# Altium PCB Plaque_PCB.PcbDoc
Units mil, origin at the board's own origin, x right, y up, seen from the top; angles counter-clockwise.
Board outline 3800 x 2700 mil, 2 copper layers (Top Layer, Bottom Layer), stack 61.756 mil thick; 20 components, 18 nets, 80 pads, 9 vias.
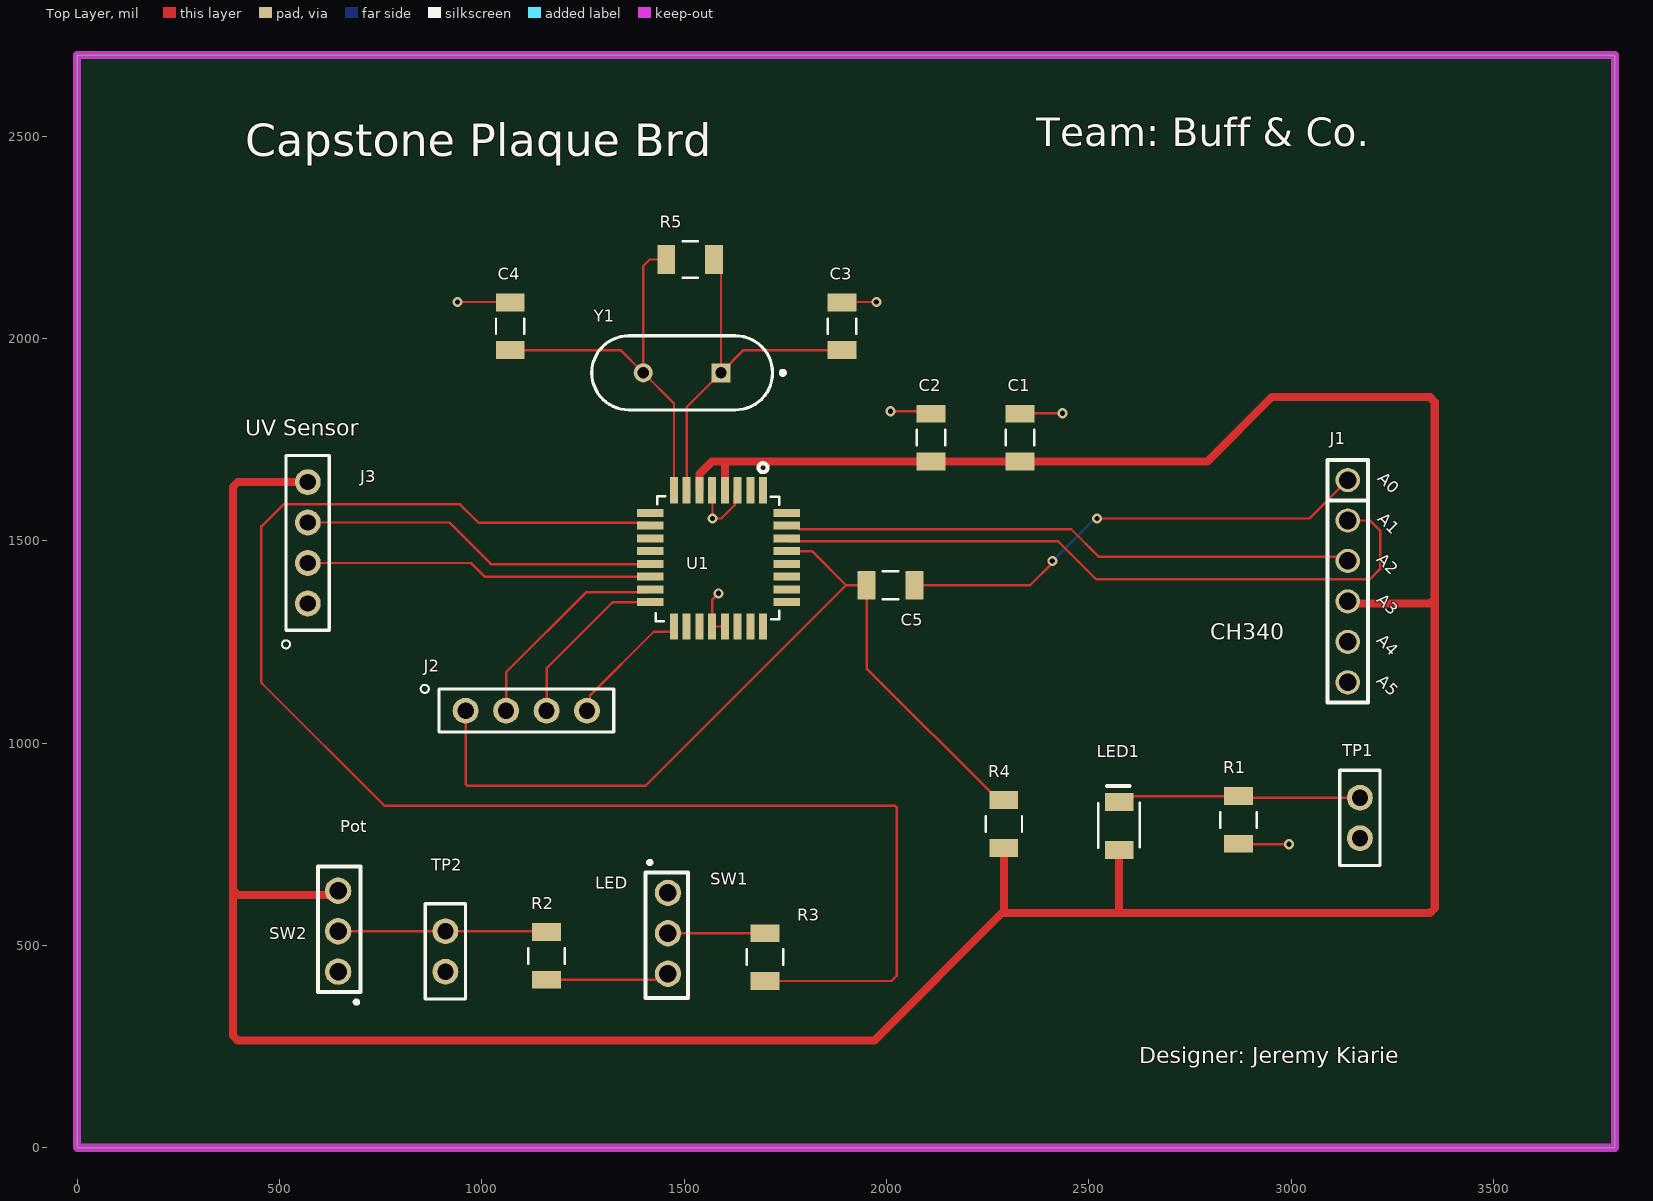
[diagram p0: Top Layer view]
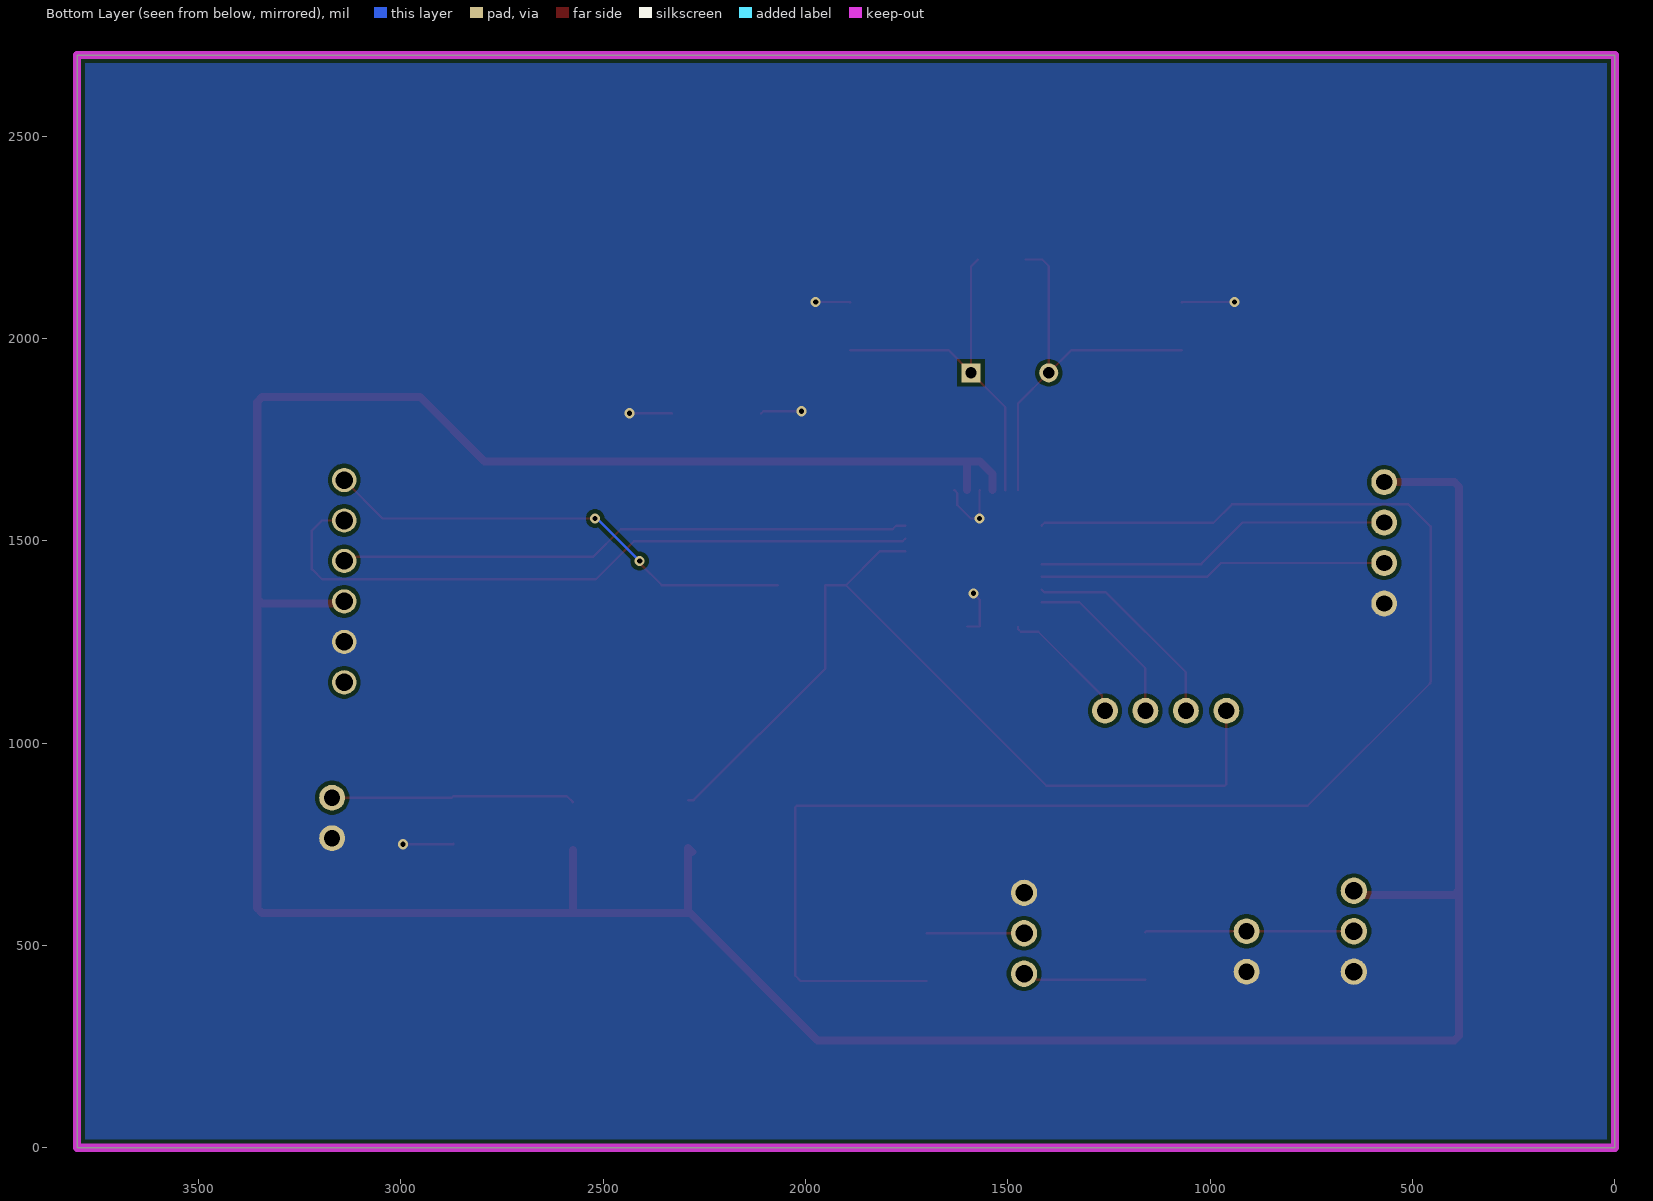
[diagram p1: Bottom Layer view, seen from below]
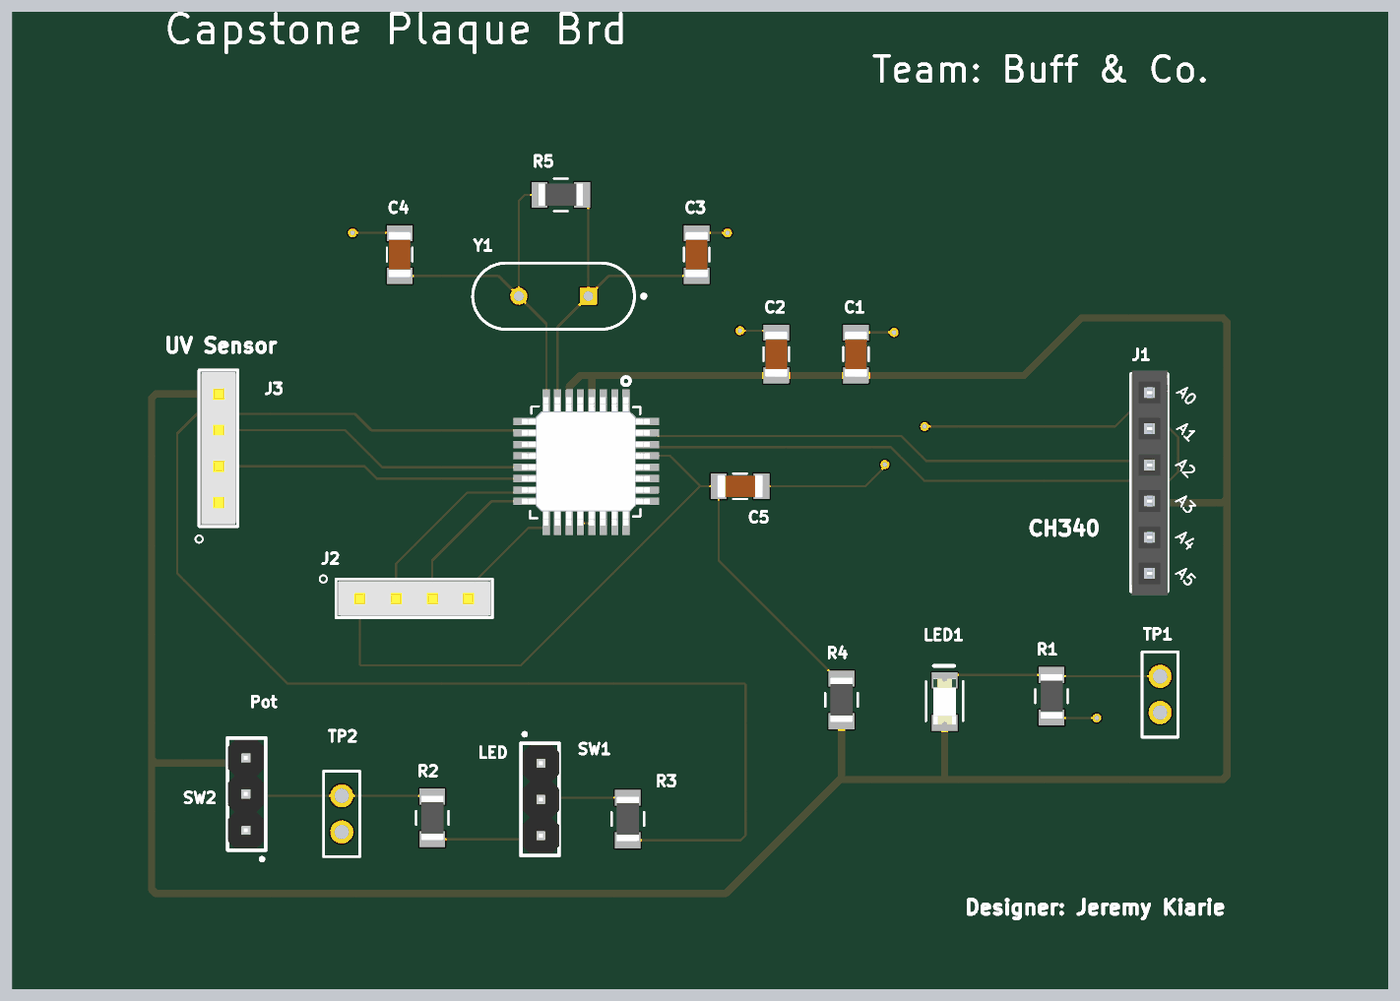
[diagram p2: 3D render of the assembled board from above, using the file's embedded part models]

## Layer stack, top to bottom
Top Solder: solder mask 1, SM-001, Dk 4
Top Layer: signal copper 1.378
Dielectric 1: core 59, Core-043, Dk 4.3
Bottom Layer: signal copper 1.378
Bottom Solder: solder mask 1, SM-001, Dk 4

## Board outline
0,0 3800,0 3800,2700 0,2700

## Design rules (kind name [scope] priority, off if disabled: settings)
Clearance [All] p1: gap=10 ignorepadtopadclearanceinfootprint=FALSE
PlaneClearance [All] p1: clearance=10
PlaneConnect [All] p1: planeconnectstyle=Direct reliefexpansion=20 reliefentries=4 reliefconductorwidth=10 reliefairgap=10
PolygonConnect [All] p1: connectstyle=Direct reliefconductorwidth=10 reliefentries=4 polygonreliefangle="90 Angle" airgapwidth=10
RoutingVias [All] p1: holewidth=13 width=25 viastyle="Through Hole" minholewidth=13 minwidth=25 maxholewidth=60 maxwidth=80
SolderMaskExpansion [All] p1: expansion=4 istentingtop=FALSE
SupplyNets "Schematic Supply Nets" [InNet('GND')] p1: voltage=0.000
UnRoutedNet [All] p1: checkbadconnections=TRUE
Width "Schematic Width Constraint" [InNet('+5V')] p1: maxlimit=100 minlimit=10 preferedwidth=20 minimp=50.000000 maximp=50.000000 favimp=50.000000
Width [All] p2: maxlimit=100 minlimit=6 preferedwidth=6 minimp=50.000000 maximp=50.000000 favimp=50.000000
27 further rules are at their usual default settings.

## Components (designator, comment, footprint, x,y, rotation, side; value= is the part's Value field where it differs from the comment)
C1 "22uF" 1206_Passive_Capacitor 2330,1755 r90 top
C2 "22uF" 1206_Passive_Capacitor 2110,1755 r90 top
C3 "22pF" 1206_Passive_Capacitor 1890,2030 r90 top
C4 "22pF" 1206_Passive_Capacitor 1070,2030 r270 top
C5 "47nF" 1206_Passive_Capacitor 2010,1390 r180 top
J1 "PPTC061LFBN-RC" 6_PIN_ARD-Analog_100mil 3140,1650 r270 top value=Female
J2 "SAMTEC-SSQ-104-01-X-SJ" JF-4_SSQ-104-01-X-S 1110,1080 r0 top
J3 "SAMTEC-SSQ-104-01-X-SJ" JF-4_SSQ-104-01-X-S 570,1495 r90 top
LED1 "Red" LED_1206 2575,795 r90 top
R1 "1k" 1206_Passive_Resitor 2870,810 r270 top value="1K Ohm"
R2 "1 Ohm" 1206_Passive_Resitor 1160,474 r270 top value=22Ohm
R3 "100Ohm" 1206_Passive_Resitor 1700,471 r90 top
R4 "10k" 1206_Passive_Resitor 2290,800 r90 top value=10KOhm
R5 "1M" 1206_Passive_Resitor 1515,2195 r0 top value="1M Ohm"
SW1 "V_SEL" 3_PIN_100mil 1460,630 r270 top value="CONN HEADER VERT 3POS 2.54MM"
SW2 "V_SEL" 3_PIN_100mil 645,435 r90 top value="CONN HEADER VERT 3POS 2.54MM"
TP1 "10x Probe TP" TP_Diff_Probe 3170,865 r270 top
TP2 "10x Probe TP" TP_Diff_Probe 910,535 r270 top
U1 "ATMEGA328P-ANR" ATMega328P 1585,1456.5 r90 top value="IC MCU 8BIT 32KB FLASH 32TQFP"
Y1 "X49SD16MSD2SC" TH_CRYSTAL 1495,1915 r180 top

## Footprints (in the part's own frame and the unit in brackets; to place one, negate y for a bottom-side part, rotate by r counter-clockwise, add the part's x,y. Pads: shape width x height; smd on the part's side, far side on the other; paste and mask are expansions set on the pad)
3_PIN_100mil [mm]
  round 1.65 hole 1.1: 1(0,0) 2(2.54,0) 3(5.08,0)
  silkscreen extent -2,-1.4 6.6,1.27, body extent -1.14,-1.27 6.48,1.27, height 8.38
6_PIN_ARD-Analog_100mil [mil]
  round 60 hole 43.31: 1(0,0) 2(100,0) 3(200,0) 4(300,0) 5(400,0) 6(500,0)
  silkscreen extent -50,-50 550,50, body extent -59,-49 561,51, height 335
1206_Passive_Capacitor [mil]
  rect 44x71 smd: 1(-59,0) 2(59,0)
  silkscreen extent -19,-35 19,35, body extent -63,-31 63,32, height 50
1206_Passive_Resitor [mil]
  rect 44x71 smd: 1(-59,0) 2(59,0)
  silkscreen extent -19,-45 19,45, body extent -61,-31 61,31, height 26
ATMega328P [mm]
  rect 1.65x0.508 smd mask+0.025: 1(4.28,-2.794) 2(4.28,-2.007) 3(4.28,-1.194) 4(4.28,-0.406) 5(4.28,0.406) 6(4.28,1.194) 7(4.28,2.007) 8(4.28,2.794) 17(-4.28,2.794) 18(-4.28,2.007) 19(-4.28,1.194) 20(-4.28,0.406) 21(-4.28,-0.406) 22(-4.28,-1.194) 23(-4.28,-2.007) 24(-4.28,-2.794)
  rect 0.508x1.65 smd mask+0.025: 9(2.843,4.28) 10(2.056,4.28) 11(1.243,4.28) 12(0.455,4.28) 13(-0.357,4.28) 14(-1.145,4.28) 15(-1.958,4.28) 16(-2.745,4.28) 25(-2.745,-4.28) 26(-1.958,-4.28) 27(-1.145,-4.28) 28(-0.357,-4.28) 29(0.455,-4.28) 30(1.243,-4.28) 31(2.056,-4.28) 32(2.843,-4.28)
  silkscreen extent -3.94,-3.81 5.97,3.94, body extent -4.45,-4.47 4.55,4.53, height 1.16
JF-4_SSQ-104-01-X-S [mm]
  round 1.62 hole 1.02: 1(-3.81,0) 2(-1.27,0) 3(1.27,0) 4(3.81,0)
  silkscreen extent -6.63,-1.35 5.49,1.63, body extent -5.33,-1.21 5.33,1.21, height 8.51
LED_1206 [mil]
  rect 44x71 smd: 1(-59,0) 2(59,0)
  silkscreen extent -54,-51 99,51, body extent -63,-31 63,31, height 28
TH_CRYSTAL [mm] "THD, 2-Leads, Body 11.35x4.65mm"
  rect 1.2x1.2 hole 0.7: 1(-2.44,0)
  round 1.2 hole 0.7: 2(2.44,0)
  silkscreen extent -6.45,-2.32 5.67,2.32, body extent -5.68,-2.33 5.68,2.33, height 3.6
TP_Diff_Probe [mm]
  round 1.62 hole 1.02: 1(0,0) 2(2.54,0)
  silkscreen extent -1.72,-1.27 4.26,1.26

## Part data
C1 C2: library part C_22uF_1206, "22uF ±10% 25V X5R 1206 Multilayer Ceramic Capacitors MLCC - SMD/SMT RoHS", LCSC Part#=C12891, MFR Part #=CL31A226KAHNNNE, Datasheet=https://datasheet.lcsc.com/lcsc/1811031514_Samsung-Electro-Mechanics-CL31A226KAHNNNE_C12891.pdf, Type=basic
C3 C4: library part C_22pF_1206, "50V 22pF C0G ±5% 1206 Multilayer Ceramic Capacitors MLCC - SMD/SMT ROHS", LCSC Part#=C107174, MFR Part #=CC1206JKNPOCBN220, Datasheet=https://datasheet.lcsc.com/lcsc/1810241219_YAGEO-CC1206JKNPOCBN220_C107174.pdf, Type=Extended
C5: library part C_10nF_1206, "10nF 50V X7R ±10% 1206 Multilayer Ceramic Capacitors MLCC - SMD/SMT ROHS", LCSC Part#=C1848, MFR Part #=CL31B105KBHNNNE, Digikey Link=https://www.digikey.com/product-detail/en/C1206C105M4RACTU/399-8150-1-ND/3471873/?itemSeq=304982366, Type=Basic
J1: library part JF_6_PIN_FEMA_ARD-Anolog, "6 Position Header Connector 0.100\" (2.54mm) Through Hole Tin", LCSC Part#=C40877, Digikey Link=https://www.digikey.com/product-detail/en/PPTC061LFBN-RC/S7004-ND/810145/?itemSeq=304982353, MFR Part #=PPTC061LFBN-RC, Type=Extended
J2 J3: library part JF_4_PIN_FEMALE, "2.54mm 3A bronze -40℃~+105℃ Straight 1x4P Top 4 1 Square Holes Straight,P=2.54mm  Female Headers ROHS", LCSC Part#=C2718488, MFR Part #=SSQ-104-01-X-SJ
LED1: library part LED_RED_1206, "Red 621~631nm 1206 Light Emitting Diodes (LED) RoHS", LCSC Part#=C93133, MFR Part #=15-21/R6C-FQ1R1B/2T, Datasheet=https://datasheet.lcsc.com/szlcsc/1811151241_Everlight-Elec-15-21-R6C-FQ1R1B-2T_C93133.pdf, Type=Extended
R1: library part R_1K_1206, "CHIP RESISTOR - SURFACE MOUNT 1KOHMS ±1% 1/4W 1206 ROHS", LCSC Part#=C4410, MFR Part #=RNCP1206FTD1K00CT, Digikey Link=https://www.digikey.com/product-detail/en/RNCP1206FTD1K00/RNCP1206FTD1K00CT-ND/2240675/?itemSeq=304982373, Type=Basic
R2: library part R_1_1206, "1Ω ±5% 0.25W ±400ppm/℃ 1206 Chip Resistor - Surface Mount RoHS", LCSC Part#=C1409, MFR Part #=1206W4J010JT5E, Datasheet=https://datasheet.lcsc.com/lcsc/1810301410_UNI-ROYAL-Uniroyal-Elec-1206W4J010JT5E_C1409.pdf, Type=Extended
R3: library part R_100_1206, "100Ω ±1% 0.25W ±100ppm/℃ 1206 Chip Resistor - Surface Mount RoHS", LCSC Part#=C17901, MFR Part #=1206W4F1000T5E, Datasheet=https://datasheet.lcsc.com/lcsc/2206010145_UNI-ROYAL-Uniroyal-Elec-1206W4F1000T5E_C17901.pdf, Type=Basic
R4: library part R_10K_1206, "10 kOhms ±5% 0.25W, 1/4W Chip Resistor 1206 (3216 Metric) Automotive AEC-Q200 Thick Film", LCSC Part#=C17902, MFR Part #=RMCF1206FT10K0, Digikey Link=https://www.digikey.com/en/products/detail/stackpole-electronics-inc/RMCF1206FT10K0/1759669, Type=Basic
R5: library part R_1M_1206, "CHIP RESISTOR - SURFACE MOUNT 1MOHMS ±1% 1/4W 1206 ROHS", LCSC Part#=C17927, MFR Part #=RMCF1206JT1M00, Digikey Link=https://www.digikey.com/product-detail/en/RMCF1206JT1M00/RMCF1206JT1M00CT-ND/1942830/?itemSeq=304982358, Type=Basic
SW1 SW2: library part SW_3Pin_100mil_Switch, "Connector Header Through Hole 3 position 0.100\" (2.54mm)", LCSC Part#=C49257, MFR Part #=PREC003SAAN-RC, Digikey Link=https://www.digikey.com/product-detail/en/PREC003SAAN-RC/S1012EC-03-ND/2774851/?itemSeq=304982371, Type=Extended
TP1 TP2: library part TP_Diff_Probe, "Test Point 300 mil centers"
U1: library part U_ATMega328P, "AVR AVR® ATmega Microcontroller IC 8-Bit 20MHz 32KB (16K x 16) FLASH 32-TQFP (7x7)", LCSC Part#=C14877, MFR Part #=ATMEGA328P-AU, Digikey Link=https://www.digikey.com/product-detail/en/ATMEGA328P-ANR/ATMEGA328P-ANRCT-ND/2774230/?itemSeq=304982365, Type=Basic
Y1: library part CRYSTAL_16MHZ_TH_1, "16MHz Through Hole Crystal Oscillator (2-pin) 20pF ±20ppm ±30ppm HC-49S Crystals ROHS", LCSC Part Number=C16212, ComponentLink1Description="LCSC Part", ComponentLink1URL=https://www.lcsc.com/product-detail/C16212.html, Mfr. Part Number=X49SD16MSD2SC

## Via types
v1: diameter 25, hole 13, Top Layer to Bottom Layer, 9 vias

## Nets (pads, with @x,y where several pads share a name; then routed paths per layer and width w, separated by ;. In a path a pad name is that pad's centre, name@x,y a point inside that pad or via, vN(x,y) a via of type N, cw(c..) or ccw(c..) an arc to the next point about the centre after c; other vN are vias at no path point)
+5V: C1.1 C2.1 J1.4 J3.4 LED1.1 R4.1 SW2.3 U1.4 U1.6 | length 8742.1
  Top Layer w20: J3.4 396.72,1645 385,1633.28 385,636.72 ; SW2.3@645,625 396.72,625 385,636.72 ; U1.6 1538,1664.76 1569.24,1696 1600,1696 ; U1.4 1601,1695 1600,1696 ; R4.1@2280,731 R4.1 2290,585 2285,580 ; LED1.1 2575,585 2580,580 ; J1.4 3145,1345 3343.28,1345 3355,1356.72 ; 385,636.72 385,276.72 396.72,265 1970,265 2285,580 ; 1600,1696 C2.1 C1.1 2793.25,1696 2952.25,1855 3343.28,1855 3355,1843.28 3355,1356.72 ; 2285,580 2580,580 ; 2580,580 3343.28,580 3355,591.72 3355,1356.72
DTR: C5.1 J1.1 | length 1181.6
  Top Layer w6: C5.1 2355,1390 2410.01,1445.01 v1(2410,1450) ; v1(2520,1555) 3045,1555 J1.1
  Bottom Layer w6: v1(2410,1450) 2515.01,1555.01 v1(2520,1555)
GND: C1.2 C2.2 C3.2 C4.1 J1.5 J3.1 R1.2 SW1.1 SW2.1 TP1.2 TP2.2 U1.3 U1.5 U1.20 U1.21 | length 848.7
  Top Layer w6: v1(940,2090) 1069,2090 C4.1 ; U1.5 1570,1624 v1(1570,1555) 1591.86,1555 1625,1588.14 1625,1618 U1.3 ; v1(1585,1370) 1569,1354 U1.20 U1.21 ; C3.2 1891,2090 v1(1975,2090) ; v1(2010,1820) 2104,1820 C2.2 ; C1.2 2331,1815 v1(2435,1815) ; R1.2 2871,750 v1(2995,750)
LED-Pot: R2.1 SW2.2 TP2.1 | length 513.3
  Top Layer w6: SW2.2 TP2.1@907.5,535 ; TP2.1 1158,535 R2.1
NetC3_1: C3.1 R5.2 U1.7 Y1.1 | length 934.4
  Top Layer w6: U1.7 1506,1829.94 Y1.1 ; R5.2 1591.06,2177.94 Y1.1 ; C3.1 1647.06,1971 Y1.1
NetC4_2: C4.2 R5.1 U1.8 Y1.2 | length 1001.3
  Top Layer w6: C4.2 1342.94,1971 Y1.2 ; R5.1 1415,2195 1398.94,2178.94 Y1.2 ; U1.8 1475,1838.94 Y1.2
NetLED1_2: LED1.2 R1.1 TP1.1 | length 602.9
  Top Layer w6: LED1.2 2590,869 R1.1 2874,865 TP1.1
NetR2_2: R2.2 SW1.3 | length 306.2
  Top Layer w6: R2.2 1429.05,415 1444.05,430 SW1.3
NetR3_1: R3.1 U1.10 | length 3835.6
  Top Layer w6: U1.10 1409.5,1544.43 991.94,1544.43 946.48,1589.89 509.89,1589.89 455.39,1535.39 455.39,1151.14 ccw(c461.39,1151.19) 457.57,1146.57 759.13,845 2021.49,845 2025,841.49 2025,425 2012,412 R3.1
PB1_Trig: J3.3 U1.13 | length 889
  Top Layer w6: J3.3 920,1545 1022.57,1442.43 U1.13
PB2_Echo: J3.2 U1.14 | length 860.4
  Top Layer w6: J3.2 973.04,1445 1006.61,1411.43 U1.14
PB3_Mosi: J2.2 U1.15 | length 536.2
  Top Layer w6: J2.2 1060,1175 1257.43,1372.43 1409.5,1372.43 U1.15
PB4_Miso: J2.3 U1.16 | length 429.2
  Top Layer w6: J2.3 1160,1185 1323.43,1348.43 U1.16
PB5_Sck: J2.4 U1.17 | length 322.2
  Top Layer w6: J2.4 1267.38,1087.38 1267.38,1117.38 1425,1275 1468,1275 1475,1282 U1.17
PD6_LED: R3.2 SW1.2 | length 240
  Top Layer w6: SW1.2 R3.2
RST: C5.2 J2.1 R4.2 U1.29 | length 2239.8
  Top Layer w6: J2.1 960,898.51 963.51,895 1405,895 1900,1390 ; U1.29 1815.57,1474.43 1900,1390 ; R4.2 2276.5,859 1951,1184.5 C5.2 1900,1390
Rx_328: J1.2 U1.30 | length 1703.8
  Top Layer w6: U1.30 1760.5,1498.43 2424.68,1498.43 2518.11,1405 3195,1405 3220,1430 3220,1525 3195,1550 J1.2
Tx_328: J1.3 U1.31 | length 1422.7
  Top Layer w6: U1.31 1775.98,1537.43 1784.98,1528.43 2456.57,1528.43 2525,1460 3130,1460 J1.3
pads on no net: J1.6 U1.1 U1.2 U1.9 U1.11 U1.12 U1.18 U1.19 U1.22 U1.23 U1.24 U1.25 U1.26 U1.27 U1.28 U1.32

## Polygon pours and split planes (outlines as drawn)
GND on Bottom Layer "GND_L02_P000" (solid, pour order 0): 0,2700 3800,2700 3800,0 0,0

## Keep-outs
Keep-Out Layer:
  the board outline again, w20

## Silkscreen, mask and mechanical layers (free items; w line width, h text height)
Top Overlay:
  text "Team: Buff & Co." at 2370,2475 h70
  text "Capstone Plaque Brd" at 415,2450 h80
  text "UV Sensor" at 415,1760 h40
  text "CH340" at 2800,1255 h40
  text "Pot" at 650,780 h30
  text "LED" at 1280,640 h30
  text "Designer: Jeremy Kiarie" at 2625,208.33 h40

## Text inside footprints (layer, text, board x,y; h text height)
J1: Top Overlay "A5" at 3209.07,1152 h30 r315; Top Overlay "A4" at 3209.07,1252 h30 r315; Top Overlay "A3" at 3209.07,1352 h30 r315; Top Overlay "A2" at 3209.07,1452 h30 r315; Top Overlay "A0" at 3212,1652 h30 r315; Top Overlay "A1" at 3212,1552 h30 r315